# EAGLE board PCB_ (EAGLE 9.7.0)
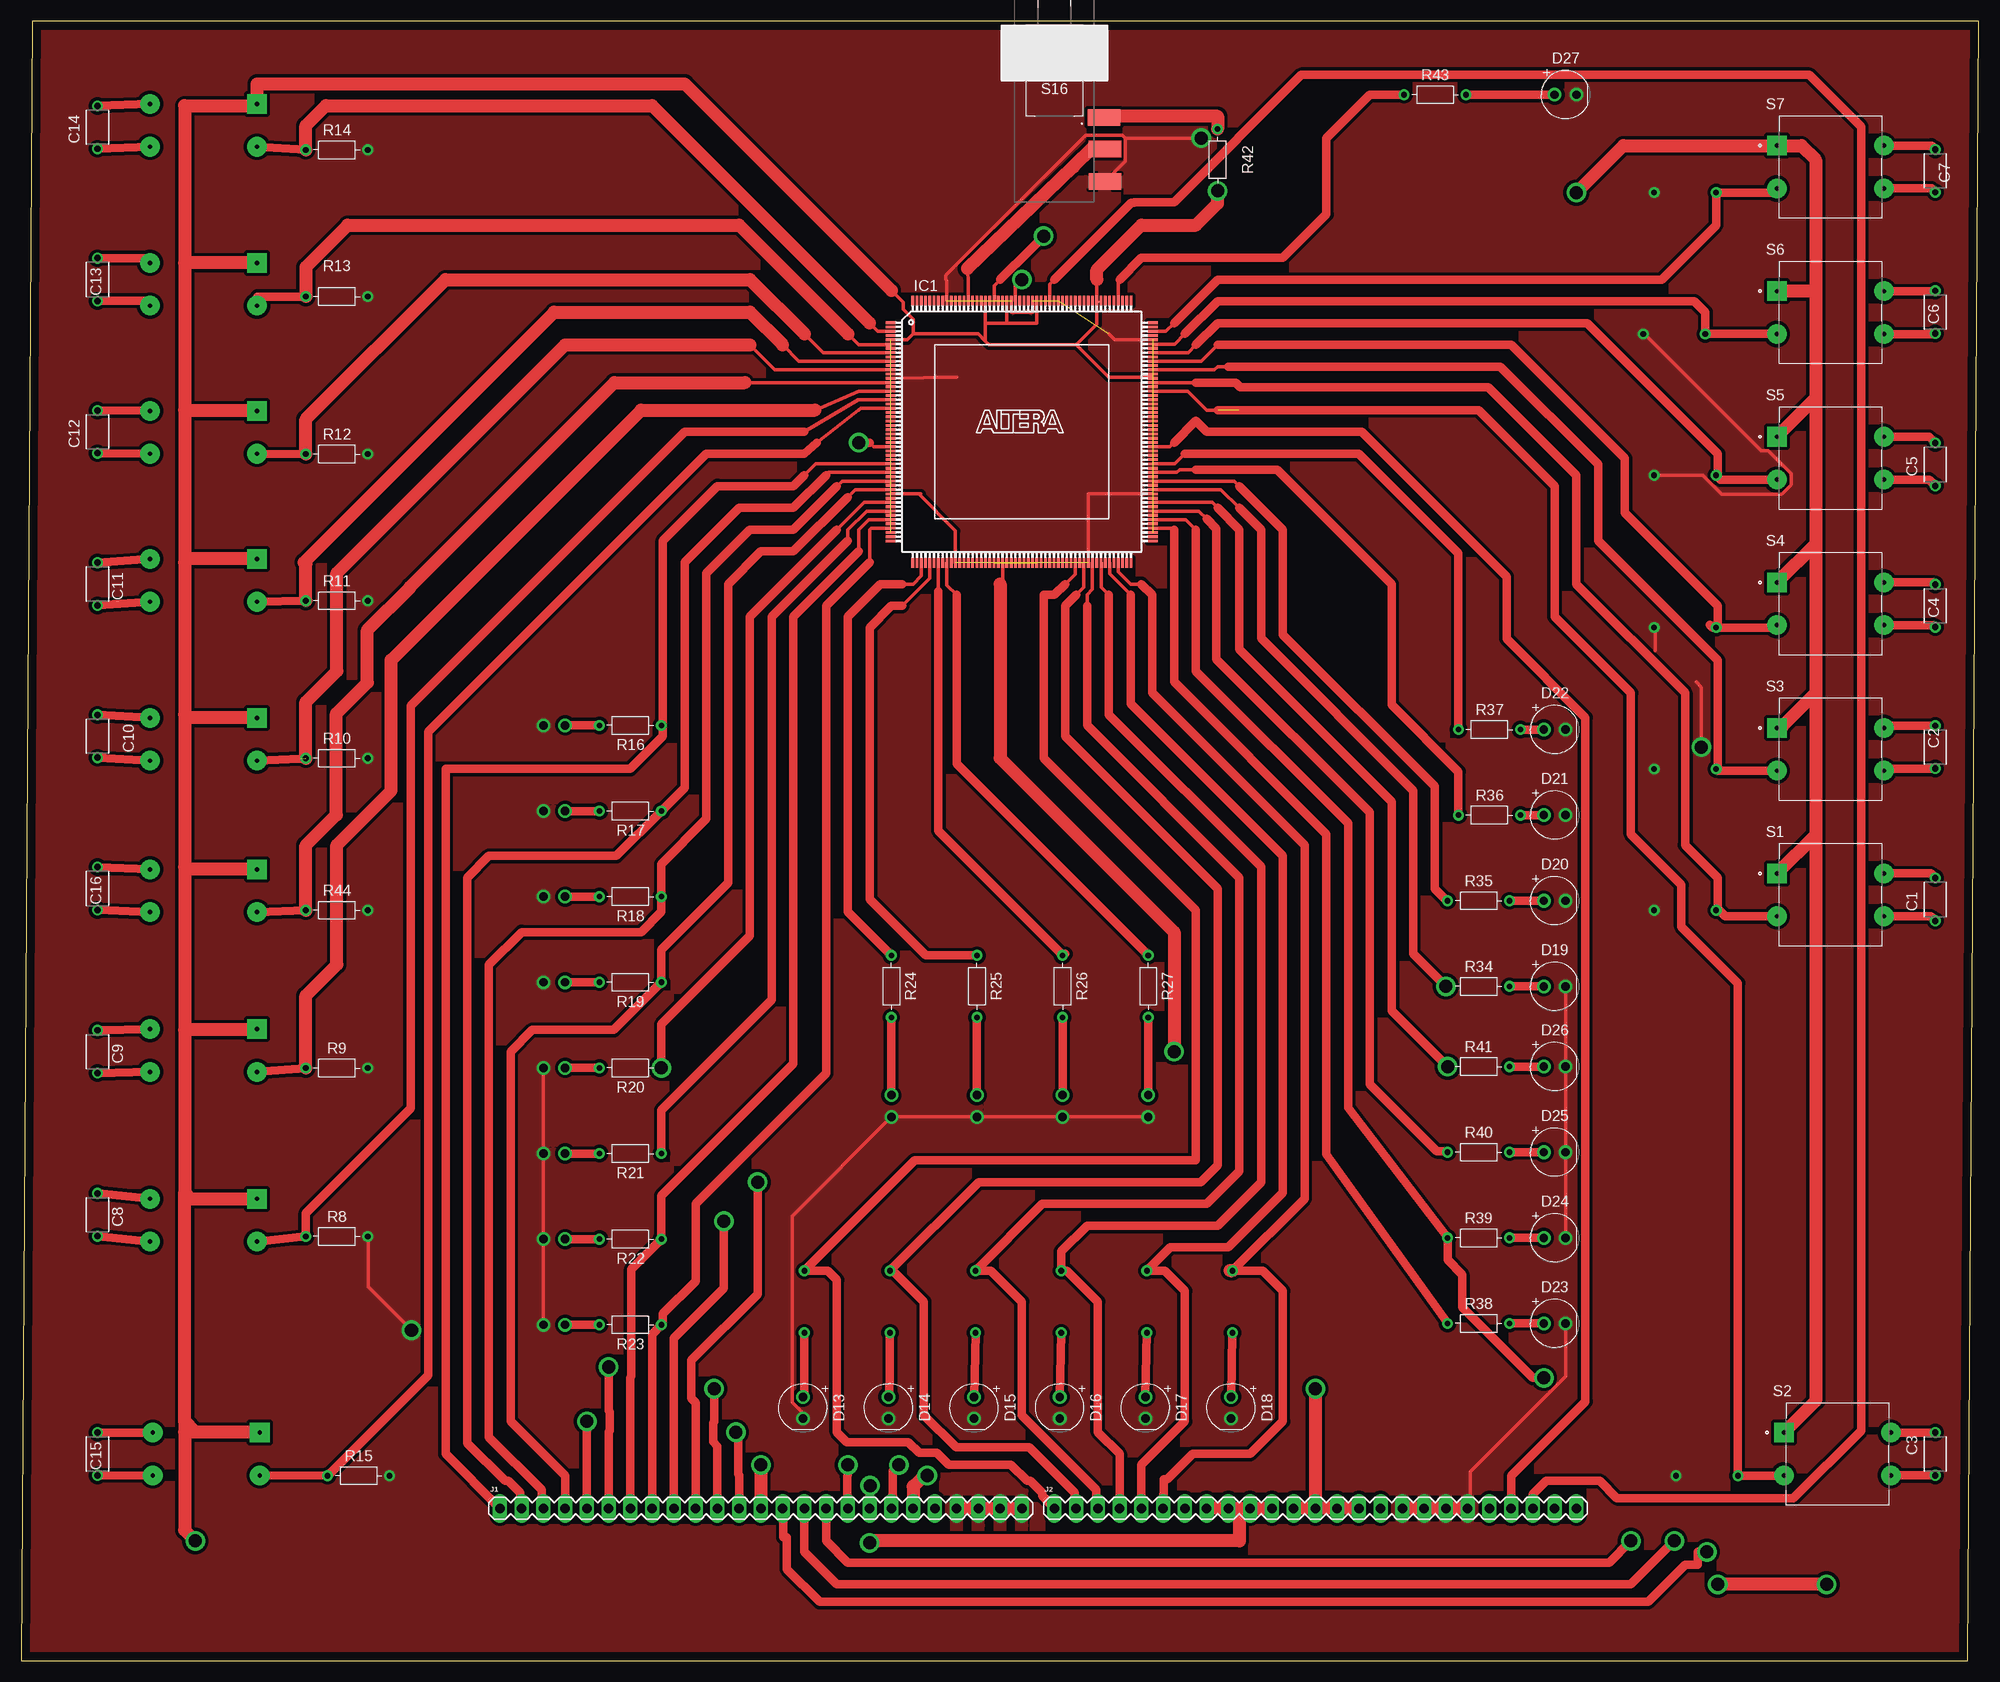
[diagram p0: board, top side]
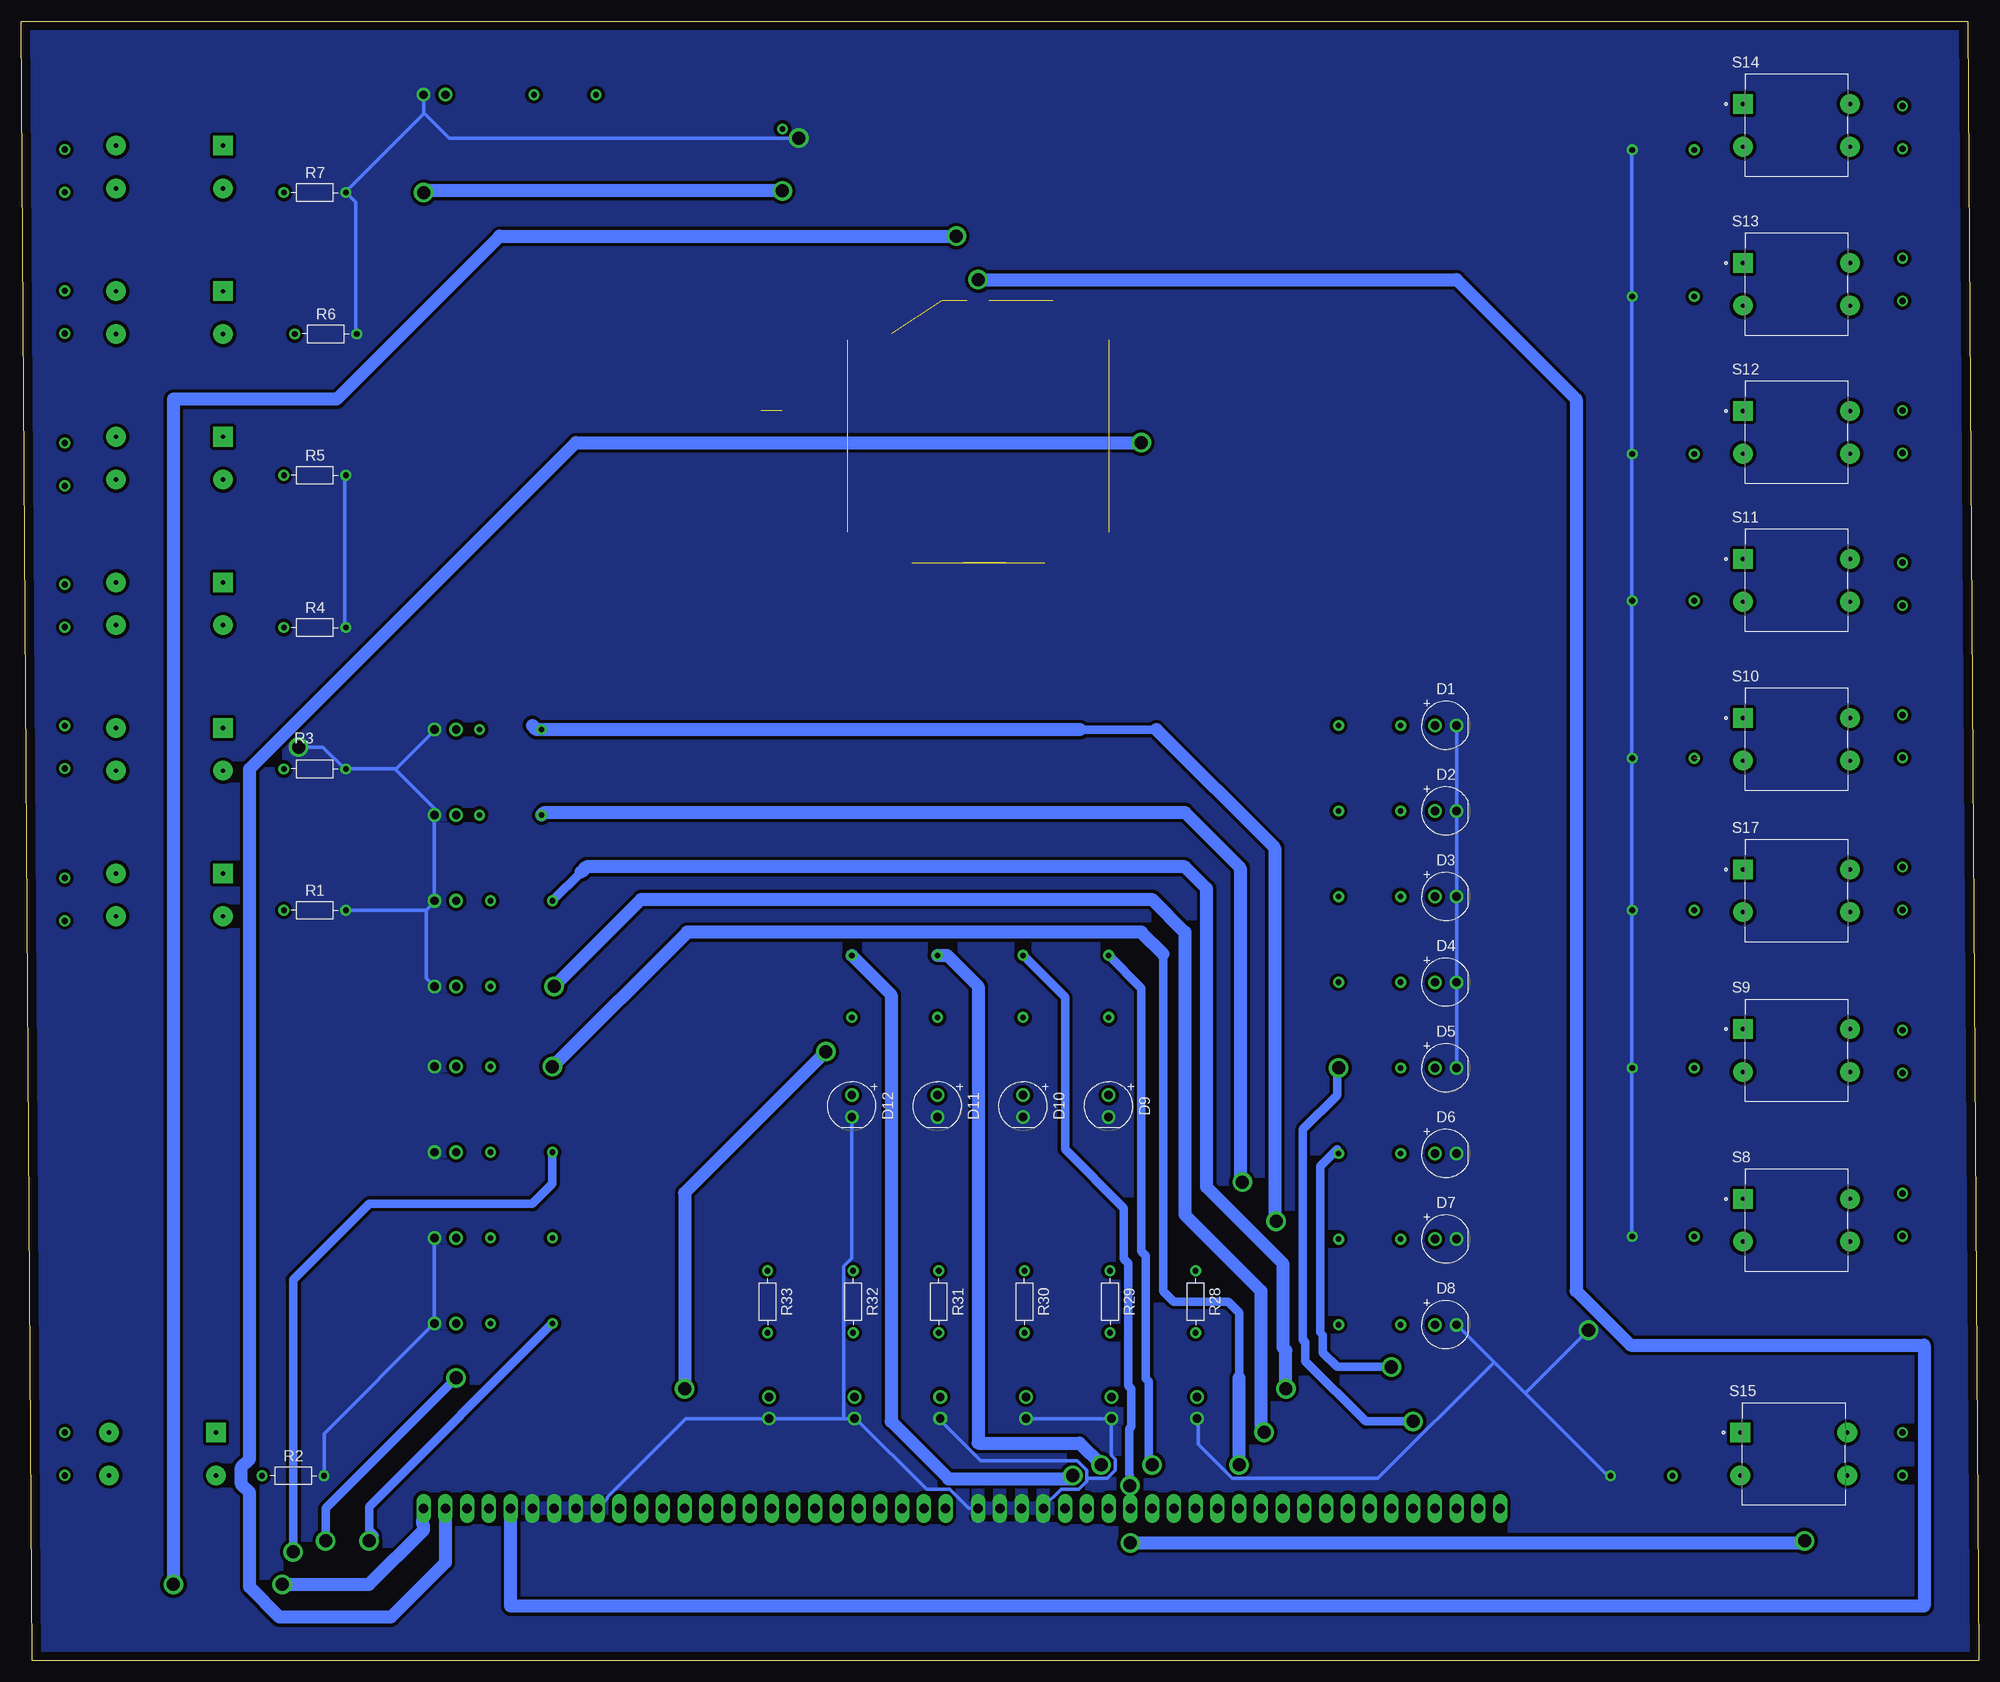
[diagram p1: board, bottom side, seen from below]

Size 228.58 x 191.44 mm. Coordinates in mm from the lower left corner, seen from the top.
Outline: 0,0 227.31,0 228.58,191.44 1.27,191.44 0,0
Copper layers (1*16): Top 0.035mm / dielectric 1.5mm / Bottom 0.035mm
Design rules "default": minimum track width 6mil, minimum drill 0.35mm, track to track 6mil, track to pad 6mil, pad to pad 6mil, via to via 6mil, smd to smd 6mil, copper to edge 40mil, drill to drill 6mil, minimum pad ring 10mil, minimum via ring 8mil, stop-mask expansion 4mil, vias tented up to drill 0mil, thermal gap 10mil
Net classes: 0 default: width 1.016 mm, drill 1.016 mm, clearance 0.762 mm; 1 pwr: width 0.381 mm, drill 0.381 mm, clearance 0.381 mm

## Footprints (pad centres in the part's own frame; a part is rotated, then mirrored left to right if it is on the bottom)
K104K15X7RF53H5 = drill 0.75 pad 1.25: 1 -2.5,0; 2 2.5,0
LEDRD254W60D565H860B = drill 0.981 pad 1.581: 1 -1.27,0; 2 1.27,0
RQFP208 = smd 1.2 x 0.32: 1 -15.3,12.75; 2 -15.3,12.25; 3 -15.3,11.75; 4 -15.3,11.25; 5 -15.3,10.75; 6 -15.3,10.25; 7 -15.3,9.75; 8 -15.3,9.25; 9 -15.3,8.75; 10 -15.3,8.25; 11 -15.3,7.75; 12 -15.3,7.25; 13 -15.3,6.75; 14 -15.3,6.25; 15 -15.3,5.75; 16 -15.3,5.25; 17 -15.3,4.75; 18 -15.3,4.25; 19 -15.3,3.75; 20 -15.3,3.25; 21 -15.3,2.75; 22 -15.3,2.25; 23 -15.3,1.75; 24 -15.3,1.25; 25 -15.3,0.75; 26 -15.3,0.25; 27 -15.3,-0.25; 28 -15.3,-0.75; 29 -15.3,-1.25; 30 -15.3,-1.75; 31 -15.3,-2.25; 32 -15.3,-2.75; 33 -15.3,-3.25; 34 -15.3,-3.75; 35 -15.3,-4.25; 36 -15.3,-4.75; 37 -15.3,-5.25; 38 -15.3,-5.75; 39 -15.3,-6.25; 40 -15.3,-6.75; 41 -15.3,-7.25; 42 -15.3,-7.75; 43 -15.3,-8.25; 44 -15.3,-8.75; 45 -15.3,-9.25; 46 -15.3,-9.75; 47 -15.3,-10.25; 48 -15.3,-10.75; 49 -15.3,-11.25; 50 -15.3,-11.75; 51 -15.3,-12.25; 52 -15.3,-12.75; 105 15.3,-12.75; 106 15.3,-12.25; 107 15.3,-11.75; 108 15.3,-11.25; 109 15.3,-10.75; 110 15.3,-10.25; 111 15.3,-9.75; 112 15.3,-9.25; 113 15.3,-8.75; 114 15.3,-8.25; 115 15.3,-7.75; 116 15.3,-7.25; 117 15.3,-6.75; 118 15.3,-6.25; 119 15.3,-5.75; 120 15.3,-5.25; 121 15.3,-4.75; 122 15.3,-4.25; 123 15.3,-3.75; 124 15.3,-3.25; 125 15.3,-2.75; 126 15.3,-2.25; 127 15.3,-1.75; 128 15.3,-1.25; 129 15.3,-0.75; 130 15.3,-0.25; 131 15.3,0.25; 132 15.3,0.75; 133 15.3,1.25; 134 15.3,1.75; 135 15.3,2.25; 136 15.3,2.75; 137 15.3,3.25; 138 15.3,3.75; 139 15.3,4.25; 140 15.3,4.75; 141 15.3,5.25; 142 15.3,5.75; 143 15.3,6.25; 144 15.3,6.75; 145 15.3,7.25; 146 15.3,7.75; 147 15.3,8.25; 148 15.3,8.75; 149 15.3,9.25; 150 15.3,9.75; 151 15.3,10.25; 152 15.3,10.75; 153 15.3,11.25; 154 15.3,11.75; 155 15.3,12.25; 156 15.3,12.75 | smd 0.32 x 1.2: 53 -12.75,-15.3; 54 -12.25,-15.3; 55 -11.75,-15.3; 56 -11.25,-15.3; 57 -10.75,-15.3; 58 -10.25,-15.3; 59 -9.75,-15.3; 60 -9.25,-15.3; 61 -8.75,-15.3; 62 -8.25,-15.3; 63 -7.75,-15.3; 64 -7.25,-15.3; 65 -6.75,-15.3; 66 -6.25,-15.3; 67 -5.75,-15.3; 68 -5.25,-15.3; 69 -4.75,-15.3; 70 -4.25,-15.3; 71 -3.75,-15.3; 72 -3.25,-15.3; 73 -2.75,-15.3; 74 -2.25,-15.3; 75 -1.75,-15.3; 76 -1.25,-15.3; 77 -0.75,-15.3; 78 -0.25,-15.3; 79 0.25,-15.3; 80 0.75,-15.3; 81 1.25,-15.3; 82 1.75,-15.3; 83 2.25,-15.3; 84 2.75,-15.3; 85 3.25,-15.3; 86 3.75,-15.3; 87 4.25,-15.3; 88 4.75,-15.3; 89 5.25,-15.3; 90 5.75,-15.3; 91 6.25,-15.3; 92 6.75,-15.3; 93 7.25,-15.3; 94 7.75,-15.3; 95 8.25,-15.3; 96 8.75,-15.3; 97 9.25,-15.3; 98 9.75,-15.3; 99 10.25,-15.3; 100 10.75,-15.3; 101 11.25,-15.3; 102 11.75,-15.3; 103 12.25,-15.3; 104 12.75,-15.3; 157 12.75,15.3; 158 12.25,15.3; 159 11.75,15.3; 160 11.25,15.3; 161 10.75,15.3; 162 10.25,15.3; 163 9.75,15.3; 164 9.25,15.3; 165 8.75,15.3; 166 8.25,15.3; 167 7.75,15.3; 168 7.25,15.3; 169 6.75,15.3; 170 6.25,15.3; 171 5.75,15.3; 172 5.25,15.3; 173 4.75,15.3; 174 4.25,15.3; 175 3.75,15.3; 176 3.25,15.3; 177 2.75,15.3; 178 2.25,15.3; 179 1.75,15.3; 180 1.25,15.3; 181 0.75,15.3; 182 0.25,15.3; 183 -0.25,15.3; 184 -0.75,15.3; 185 -1.25,15.3; 186 -1.75,15.3; 187 -2.25,15.3; 188 -2.75,15.3; 189 -3.25,15.3; 190 -3.75,15.3; 191 -4.25,15.3; 192 -4.75,15.3; 193 -5.25,15.3; 194 -5.75,15.3; 195 -6.25,15.3; 196 -6.75,15.3; 197 -7.25,15.3; 198 -7.75,15.3; 199 -8.25,15.3; 200 -8.75,15.3; 201 -9.25,15.3; 202 -9.75,15.3; 203 -10.25,15.3; 204 -10.75,15.3; 205 -11.25,15.3; 206 -11.75,15.3; 207 -12.25,15.3; 208 -12.75,15.3
1X25_LONGPAD = drill 1.118 long: 1 0,0; 2 2.54,0; 3 5.08,0; 4 7.62,0; 5 10.16,0; 6 12.7,0; 7 15.24,0; 8 17.78,0; 9 20.32,0; 10 22.86,0; 11 25.4,0; 12 27.94,0; 13 30.48,0; 14 33.02,0; 15 35.56,0; 16 38.1,0; 17 40.64,0; 18 43.18,0; 19 45.72,0; 20 48.26,0; 21 50.8,0; 22 53.34,0; 23 55.88,0; 24 58.42,0; 25 60.96,0
RESAD724W46L381D178B = drill 0.66 pad 1.26: 1 -3.62,0; 2 3.62,0
SW_TL1100F160Q = drill 0.508 pad 2.286 square: 1 -6.25,2.5 | drill 0.508 pad 2.286: 2 6.25,2.5; 3 -6.25,-2.5; 4 6.25,-2.5
7347306 = smd 3.81 x 1.93: P$2 5.79,-0.1; P$3 5.9,-3.8; P$6 5.9,-7.6

## Placement (x,y rotation side)
C1  0.1uF  [K104K15X7RF53H5]  223.52,88.9 90 top
C2  0.1uF  [K104K15X7RF53H5]  223.52,106.68 90 top
C3  0.1uF  [K104K15X7RF53H5]  223.52,24.13 90 top
C4  0.1uF  [K104K15X7RF53H5]  223.52,123.19 90 top
C5  0.1uF  [K104K15X7RF53H5]  223.52,139.7 90 top
C6  0.1uF  [K104K15X7RF53H5]  223.52,157.48 90 top
C7  0.1uF  [K104K15X7RF53H5]  223.52,173.99 90 top
C8  0.1uF  [K104K15X7RF53H5]  8.89,52.07 90 top
C9  0.1uF  [K104K15X7RF53H5]  8.89,71.12 90 top
C10  0.1uF  [K104K15X7RF53H5]  8.89,107.95 90 top
C11  0.1uF  [K104K15X7RF53H5]  8.89,125.73 90 top
C12  0.1uF  [K104K15X7RF53H5]  8.89,143.51 90 top
C13  0.1uF  [K104K15X7RF53H5]  8.89,161.29 90 top
C14  0.1uF  [K104K15X7RF53H5]  8.89,179.07 90 top
C15  0.1uF  [K104K15X7RF53H5]  8.89,24.13 90 top
C16  0.1uF  [K104K15X7RF53H5]  8.89,90.17 90 top
D1  LED_RED  [LEDRD254W60D565H860B]  62.23,109.22 0 bottom
D2  LED_RED  [LEDRD254W60D565H860B]  62.23,99.22 0 bottom
D3  LED_RED  [LEDRD254W60D565H860B]  62.23,89.22 0 bottom
D4  LED_RED  [LEDRD254W60D565H860B]  62.23,79.22 0 bottom
D5  LED_RED  [LEDRD254W60D565H860B]  62.23,69.22 0 bottom
D6  LED_RED  [LEDRD254W60D565H860B]  62.23,59.22 0 bottom
D7  LED_RED  [LEDRD254W60D565H860B]  62.23,49.22 0 bottom
D8  LED_RED  [LEDRD254W60D565H860B]  62.23,39.22 0 bottom
D9  LED_RED  [LEDRD254W60D565H860B]  101.6,64.77 270 bottom
D10  LED_RED  [LEDRD254W60D565H860B]  111.6,64.77 270 bottom
D11  LED_RED  [LEDRD254W60D565H860B]  121.6,64.77 270 bottom
D12  LED_RED  [LEDRD254W60D565H860B]  131.6,64.77 270 bottom
D13  LED_RED  [LEDRD254W60D565H860B]  91.27,29.53 270 top
D14  LED_RED  [LEDRD254W60D565H860B]  101.27,29.53 270 top
D15  LED_RED  [LEDRD254W60D565H860B]  111.27,29.53 270 top
D16  LED_RED  [LEDRD254W60D565H860B]  121.27,29.53 270 top
D17  LED_RED  [LEDRD254W60D565H860B]  131.27,29.53 270 top
D18  LED_RED  [LEDRD254W60D565H860B]  141.27,29.53 270 top
D19  LED_RED  [LEDRD254W60D565H860B]  179.07,78.74 0 top
D20  LED_RED  [LEDRD254W60D565H860B]  179.07,88.74 0 top
D21  LED_RED  [LEDRD254W60D565H860B]  179.07,98.74 0 top
D22  LED_RED  [LEDRD254W60D565H860B]  179.07,108.74 0 top
D23  LED_RED  [LEDRD254W60D565H860B]  179.07,39.37 0 top
D24  LED_RED  [LEDRD254W60D565H860B]  179.07,49.37 0 top
D25  LED_RED  [LEDRD254W60D565H860B]  179.07,59.37 0 top
D26  LED_RED  [LEDRD254W60D565H860B]  179.07,69.37 0 top
D27  LED_RED  [LEDRD254W60D565H860B]  180.34,182.88 0 top
IC1  EPM7256-Q208  [RQFP208]  116.84,143.51 0 top
J1  LEFT  [1X25_LONGPAD]  55.88,17.78 0 top
J2  LEFT  [1X25_LONGPAD]  120.65,17.78 0 top
R1  10k  [RESAD724W46L381D178B]  194.31,87.63 0 bottom
R2  10k  [RESAD724W46L381D178B]  196.85,21.59 0 bottom
R3  10k  [RESAD724W46L381D178B]  194.31,104.14 0 bottom
R4  10k  [RESAD724W46L381D178B]  194.31,120.65 0 bottom
R5  10k  [RESAD724W46L381D178B]  194.31,138.43 0 bottom
R6  10k  [RESAD724W46L381D178B]  193.04,154.94 0 bottom
R7  10k  [RESAD724W46L381D178B]  194.31,171.45 0 bottom
R8  10k  [RESAD724W46L381D178B]  36.83,49.53 0 top
R9  10k  [RESAD724W46L381D178B]  36.83,69.2 0 top
R10  10k  [RESAD724W46L381D178B]  36.83,105.38 0 top
R11  10k  [RESAD724W46L381D178B]  36.83,123.78 0 top
R12  10k  [RESAD724W46L381D178B]  36.83,140.91 0 top
R13  10k  [RESAD724W46L381D178B]  36.83,159.31 0 top
R14  10k  [RESAD724W46L381D178B]  36.83,176.44 0 top
R15  10k  [RESAD724W46L381D178B]  39.37,21.59 0 top
R16  220  [RESAD724W46L381D178B]  71.12,109.22 180 top
R17  220  [RESAD724W46L381D178B]  71.12,99.22 180 top
R18  220  [RESAD724W46L381D178B]  71.12,89.22 180 top
R19  220  [RESAD724W46L381D178B]  71.12,79.22 180 top
R20  220  [RESAD724W46L381D178B]  71.12,69.22 180 top
R21  220  [RESAD724W46L381D178B]  71.12,59.22 180 top
R22  220  [RESAD724W46L381D178B]  71.12,49.22 180 top
R23  220  [RESAD724W46L381D178B]  71.12,39.22 180 top
R24  220  [RESAD724W46L381D178B]  101.6,78.74 270 top
R25  220  [RESAD724W46L381D178B]  111.6,78.74 270 top
R26  220  [RESAD724W46L381D178B]  121.6,78.74 270 top
R27  220  [RESAD724W46L381D178B]  131.6,78.74 270 top
R28  220  [RESAD724W46L381D178B]  91.44,41.91 270 bottom
R29  220  [RESAD724W46L381D178B]  101.44,41.91 270 bottom
R30  220  [RESAD724W46L381D178B]  111.44,41.91 270 bottom
R31  220  [RESAD724W46L381D178B]  121.44,41.91 270 bottom
R32  220  [RESAD724W46L381D178B]  131.44,41.91 270 bottom
R33  220  [RESAD724W46L381D178B]  141.44,41.91 270 bottom
R34  220  [RESAD724W46L381D178B]  170.18,78.74 0 top
R35  220  [RESAD724W46L381D178B]  170.18,88.74 0 top
R36  220  [RESAD724W46L381D178B]  171.45,98.74 0 top
R37  220  [RESAD724W46L381D178B]  171.45,108.74 0 top
R38  220  [RESAD724W46L381D178B]  170.18,39.37 0 top
R39  220  [RESAD724W46L381D178B]  170.18,49.37 0 top
R40  220  [RESAD724W46L381D178B]  170.18,59.37 0 top
R41  220  [RESAD724W46L381D178B]  170.18,69.37 0 top
R42  10k  [RESAD724W46L381D178B]  139.7,175.26 270 top
R43  220  [RESAD724W46L381D178B]  165.1,182.88 0 top
R44  10k  [RESAD724W46L381D178B]  36.83,87.63 0 top
S1  INC_VIS3  [SW_TL1100F160Q]  211.27,89.43 0 top
S2  INI_TMP  [SW_TL1100F160Q]  212.09,24.13 0 top
S3  INC_VIS2  [SW_TL1100F160Q]  211.27,106.43 0 top
S4  INC_VIS1  [SW_TL1100F160Q]  211.27,123.43 0 top
S5  INC_LOC3  [SW_TL1100F160Q]  211.27,140.43 0 top
S6  INC_LOC2  [SW_TL1100F160Q]  211.27,157.43 0 top
S7  INC_LOC1  [SW_TL1100F160Q]  211.27,174.43 0 top
S8  DEC_SEG  [SW_TL1100F160Q]  21.27,51.43 0 bottom
S9  INC_SEC  [SW_TL1100F160Q]  21.27,71.26 0 bottom
S10  INC_MIN  [SW_TL1100F160Q]  21.27,107.6 0 bottom
S11  DEC_VIS  [SW_TL1100F160Q]  21.27,126.16 0 bottom
S12  INC_VIS  [SW_TL1100F160Q]  21.27,143.45 0 bottom
S13  DEC_LOC  [SW_TL1100F160Q]  21.27,160.74 0 bottom
S14  INC_LOC  [SW_TL1100F160Q]  21.27,179.3 0 bottom
S15  RST_BTN  [SW_TL1100F160Q]  21.59,24.13 0 bottom
S16  ARR_BTN  [7347306]  120.65,180.34 0 top
S17  DEC_MIN  [SW_TL1100F160Q]  21.27,89.91 0 bottom

## Library data of the parts
C1-C16 = Library_Capacitor_Ceramico; ARROW_PART_NUMBER: K104K15X7RF53H5; ARROW_PRICE-STOCK: https://www.arrow.com/en/products/k104k15x7rf53h5/vishay?region=nac; DESCRIPTION: Vishay 100nF Multilayer Ceramic Capacitor MLCC 50V dc +/-10% Through Hole K104K15X7RF53H5; HEIGHT: mm; MANUFACTURER_NAME: Vishay; MANUFACTURER_PART_NUMBER: K104K15X7RF53H5; MOUSER_PART_NUMBER: 594-K104K15X7RF53H5; MOUSER_PRICE-STOCK: https://www.mouser.co.uk/ProductDetail/Vishay-BC-Components/K104K15X7RF53H5?qs=sYfpZ29HcUSlgH5bSUHkYw%3D%3D
D1-D27 = Opto-Electronic; CATEGORY: Opto-Electronic; SUB-CATEGORY: LED
IC1 = altera; MPN: EPM7256AEQC208-10N; OC_FARNELL: 1549440; OC_NEWARK: 51R9842
J1 J2 = SparkFun-Connectors
R1-R44 = Resistor; CATEGORY: Resistor; SUB-CATEGORY: Fixed
S1-S15 S17 = SnapEDA Library; MANUFACTURER: E-Switch; MAXIMUM_PACKAGE_HEIGHT: 7.3mm; PARTREV: D; SNAPEDA_PN: TL1100F160Q; STANDARD: Manufacturer Recommendations
S16 = Library_Switch; DESCRIPTION: SPDT Slide Switch; HEIGHT: 12.7mm; MANUFACTURER_NAME: RS Components; MANUFACTURER_PART_NUMBER: 734-7306

## Nets
5V [pwr]: IC1.74 J2.12 J2.13 J2.14 J2.15
CLK: IC1.184 J2.21
GND [pwr]: D1.2 D2.2 D3.2 D4.2 D5.2 D6.2 D7.2 D8.2 D9.2 D10.2 D11.2 D12.2 D13.2 D14.2 D15.2 D16.2 D17.2 D18.2 D19.2 D20.2 D21.2 D22.2 D23.2 D24.2 D25.2 D26.2 D27.2 IC1.14 IC1.32 IC1.50 IC1.72 IC1.75 IC1.82 IC1.94 IC1.116 IC1.134 IC1.152 IC1.174 IC1.180 IC1.185 IC1.200 J1.22 J1.23 J1.24 J1.25 J2.17 J2.18 J2.19 J2.20 R1.2 R2.2 R3.2 R4.2 R5.2 R6.2 R7.2 R8.2 R9.2 R10.2 R11.2 R12.2 R13.2 R14.2 R15.2 R44.2 S16.P$6
LOC0: IC1.34 J1.1 R16.1
LOC1: IC1.36 J1.2 R17.1
LOC2: IC1.38 J1.3 R18.1
LOC3: IC1.40 J1.4 R19.1
LOC4: IC1.43 J1.5 R20.1
LOC5: IC1.45 J1.6 R21.1
LOC6: IC1.47 J1.7 R22.1
LOC7: IC1.49 J1.8 R23.1
MIN0: IC1.55 J1.17 R24.1
MIN1: IC1.57 J1.18 R25.1
MIN2: IC1.59 J1.19 R26.1
MIN3: IC1.61 J1.20 R27.1
N$1: IC1.3 R14.1 S14.3
N$2: IC1.10 R11.1 S11.3
N$3: IC1.142 R1.1 S1.3
N$4: C1.1 S1.4
N$5: C1.2 S1.2
N$6: IC1.140 R2.1 S2.3
N$7: C2.1 S3.4
N$8: C3.1 S2.4
N$9: IC1.145 R3.1 S3.3
N$10: C3.2 S2.2
N$11: C2.2 S3.2
N$12: IC1.147 R4.1 S4.3
N$13: C4.1 S4.4
N$14: C4.2 S4.2
N$15: IC1.8 R12.1 S12.3
N$16: C5.1 S5.4
N$17: C5.2 S5.2
N$18: IC1.151 R6.1 S6.3
N$19: IC1.149 R5.1 S5.3
N$20: C6.1 S6.4
N$21: IC1.19 R8.1 S8.3
N$22: C8.1 S8.4
N$23: C8.2 S8.2
N$24: C15.1 S15.4
N$25: IC1.17 R9.1 S9.3
N$26: C9.1 S9.4
N$27: C9.2 S9.2
N$28: C10.1 S10.4
N$29: C10.2 S10.2
N$30: C11.1 S11.4
N$31: C11.2 S11.2
N$32: C12.1 S12.4
N$33: C12.2 S12.2
N$34: IC1.6 R13.1 S13.3
N$35: C13.1 S13.4
N$36: C13.2 S13.2
N$37: C15.2 S15.2
N$38: C14.1 S14.4
N$39: C16.1 S17.4
N$40: C14.2 S14.2
N$41: IC1.12 R10.1 S10.3
N$42: C16.2 S17.2
N$45: D1.1 R16.2
N$46: D2.1 R17.2
N$47: D3.1 R18.2
N$48: D4.1 R19.2
N$49: D5.1 R20.2
N$50: D6.1 R21.2
N$51: D7.1 R22.2
N$52: D8.1 R23.2
N$53: D27.1 R43.2
N$54: C6.2 S6.2
N$55: IC1.154 R7.1 S7.3
N$56: C7.1 S7.4
N$57: C7.2 S7.2
N$61: D9.1 R24.2
N$62: D10.1 R25.2
N$63: D11.1 R26.2
N$64: D12.1 R27.2
N$65: D13.1 R28.2
N$66: D14.1 R29.2
N$67: D15.1 R30.2
N$68: D16.1 R31.2
N$78: D17.1 R32.2
N$79: D18.1 R33.2
N$80: D19.1 R34.2
N$81: D20.1 R35.2
N$84: D21.1 R36.2
N$85: D22.1 R37.2
N$90: D23.1 R38.2
N$91: D24.1 R39.2
N$92: D25.1 R40.2
N$93: D26.1 R41.2
N$98: IC1.195 S16.P$3
N$99: R42.1 S16.P$2
PIN15: IC1.15 R44.1 S17.3
RST: IC1.21 R15.1 S15.3
SEG0: IC1.91 J2.1 R28.1
SEG1: IC1.93 J2.2 R29.1
SEG2: IC1.95 J2.3 R30.1
SEG3: IC1.97 J2.4 R31.1
SEG4: IC1.99 J2.5 R32.1
SEG5: IC1.101 J2.6 R33.1
SIRENA: IC1.160 R43.1
TCK: IC1.30 J2.24
TDI: IC1.176 J2.23
TDO: IC1.189 J2.25
TMS: IC1.127 J2.22
VCC [pwr]: IC1.5 IC1.23 IC1.41 IC1.63 IC1.83 IC1.85 IC1.107 IC1.125 IC1.143 IC1.165 IC1.179 IC1.186 IC1.191 J2.8 J2.9 J2.10 J2.11 R42.2 S1.1 S2.1 S3.1 S4.1 S5.1 S6.1 S7.1 S8.1 S9.1 S10.1 S11.1 S12.1 S13.1 S14.1 S15.1 S17.1
VIS0: IC1.123 J1.9 R37.1
VIS1: IC1.121 J1.10 R36.1
VIS2: IC1.119 J1.11 R35.1
VIS3: IC1.117 J1.12 R34.1
VIS4: IC1.114 J1.13 R41.1
VIS5: IC1.112 J1.14 R40.1
VIS6: IC1.110 J1.15 R39.1
VIS7: IC1.108 J1.16 R38.1

## Tracks (layer width: path | path; a pad name or v marks a point on that pad's centre or on a via)
5V  (via drill 1.52)
  Top 0.381: IC1.74 114.59,126.02 114.3,125.73
  Top 1.524: J2.15 J2.14 J2.13 | J2.13 J2.12 | 114.3,125.73 114.3,105.41 134.62,85.09 v134.62,71.12 | v151.13,31.75 J2.13
  Bottom 1.524: v134.62,71.12 151.13,54.61 v151.13,31.75
CLK  (via drill 1.52)
  Top 0.381: IC1.184 116.09,160.54 v116.84,161.29
  Bottom 1.524: v116.84,161.29 60.96,161.29 46.99,147.32 46.99,43.18 40.64,36.83 6.35,36.83 6.35,6.35 171.45,6.35 J2.21
GND  (via drill 1.52)  (10 unrouted)
  Top 0.381: IC1.200 108.09,161.15 107.95,161.29 107.95,161.77 124.3,178.12 128.59,178.12 128.91,177.8 | IC1.185 115.59,157.46 118.09,157.46 118.11,157.48 118.09,157.5 IC1.180 | 128.91,177.8 128.91,175.1 126.68,172.88 S16.P$6 | R5.2 196.37,138.43 198.6,136.21 205.58,136.21 206.69,137.32 206.69,138.59 203.99,141.29 203.2,141.29 189.55,154.94 R6.2 | v137.8,177.8 128.91,177.8 | D8.2 D7.2 D6.2 D5.2 | D13.2 91.12,28.42 91.12,29.05 90.01,30.16 90.01,51.91 D9.2 D10.2 D11.2 D12.2 | D19.2 D26.2 D25.2 D24.2 | D23.2 180.34,33.18 169.23,22.07 169.23,18.41 J2.20 | v45.56,38.58 40.48,43.66 40.48,49.53 R8.2 | 190.82,117.95 190.82,120.65 R4.2 | v196.22,106.68 196.22,113.66 195.58,114.3 | IC1.94 124.59,136.26 IC1.116 | IC1.152 127.68,154.26 127,154.94 | IC1.14 109.22,149.86 106.68,149.86
  Top 1.524: J2.17 J2.18 J2.19 J2.20 | J1.23 J1.25 | J1.23 110.49,17.78 | J1.23 J1.22
  Bottom 0.381: R4.2 190.82,120.65 190.82,138.43 R5.2 | R6.2 189.55,154.94 189.55,170.34 190.66,171.45 R7.2 190.66,171.61 181.61,180.66 | 181.61,180.66 D27.2 | v137.8,177.8 178.59,177.8 181.45,180.66 181.61,180.66 | R8.2 40.48,49.53 40.48,69.06 R9.2 40.48,69.37 40.48,87.47 R44.2 40.48,87.63 40.48,105.25 R10.2 40.48,105.57 40.48,123.67 R11.2 40.48,123.82 40.48,140.81 R12.2 40.48,140.97 40.48,159.23 R13.2 40.48,159.39 40.48,176.37 R14.2 | R15.2 43.34,21.59 52.94,31.19 | 56.59,34.85 D8.2 | 56.59,34.85 52.94,31.19 | D5.2 D4.2 D3.2 D2.2 D1.2 | D15.2 111.12,28.26 101.28,28.26 D14.2 101.28,28.1 101.28,23.97 100.81,23.49 100.81,22.23 101.76,21.27 104.14,21.27 | 104.14,21.27 104.14,20.95 105.09,20 107.16,20 109.22,17.94 J1.22 | 104.14,21.27 104.14,22.23 105.25,23.34 116.52,23.34 121.13,27.94 121.13,28.26 D16.2 | 132.56,28.26 141.13,28.26 D18.2 141.45,28.26 150.97,28.26 160.18,19.05 160.18,18.89 J2.17 | 132.56,28.26 131.29,28.26 D17.2 131.13,28.26 122.87,20 120.17,20 117.95,17.78 J1.25 | R2.2 193.2,21.59 193.2,26.51 D23.2 D24.2 | 184.78,104.14 R3.2 190.82,104.14 193.36,106.68 v196.22,106.68 | 184.78,104.14 180.34,108.59 D22.2 | 184.78,104.14 184.78,103.98 180.34,99.54 D21.2 D20.2 180.34,88.58 181.29,87.63 | 181.29,87.63 R1.2 | 181.29,87.63 181.29,79.69 D19.2 | 132.56,28.26 132.56,46.04 131.6,46.99 D12.2 | 56.59,34.85 70.17,21.27 87.15,21.27 91.12,25.24 91.12,28.26 D13.2 | 52.94,31.19 v45.56,38.58
  pour Top: 0.77,0.76 226.55,0.76 227.81,190.68 2.03,190.68
  pour Bottom: 0.76,-0.51 227.84,-0.51 227.84,189.74 2.03,189.74 0.76,3.81
LOC0
  Top 0.381: IC1.34 92.77,139.76 91.44,138.43
  Top 1.016: R16.1 74.93,109.41 | 74.93,109.41 74.93,130.81 81.28,137.16 90.17,137.16 91.44,138.43 | J1.1 49.53,24.13 49.53,104.14 71.12,104.14 74.93,107.95 74.93,109.41
LOC1
  Top 0.381: IC1.36 94.31,138.76 93.98,138.43
  Top 1.016: 93.98,138.43 90.17,134.62 83.82,134.62 77.47,128.27 77.47,101.95 R17.1 69.5,93.98 54.61,93.98 52.07,91.44 52.07,25.4 56.49,20.98 56.86,20.98 58.24,19.6 58.24,17.96 J1.2
LOC2
  Top 0.381: IC1.38 95.85,137.76 95.25,137.16
  Top 1.016: 95.25,137.16 90.17,132.08 85.09,132.08 80.01,127 80.01,98.3 74.74,93.03 R18.1 74.74,87.44 72.39,85.09 58.42,85.09 54.61,81.28 54.61,26.1 60.78,19.93 60.78,17.96 J1.3
LOC3
  Top 0.381: IC1.40 97.39,136.76 96.52,135.89
  Top 1.016: 96.52,135.89 90.17,129.54 86.36,129.54 82.55,125.73 82.55,90.84 74.74,83.03 R19.1 69.18,73.66 59.69,73.66 57.15,71.12 57.15,27.94 63.5,21.59 J1.4
LOC4  (via drill 1.52)
  Top 0.381: IC1.43 98.43,135.26 95.25,132.08
  Top 1.016: R20.1 74.74,74.3 85.09,84.65 85.09,121.92 95.25,132.08 | J1.5 v66.04,27.94
  Bottom 1.016: R20.1 74.93,69.03 74.93,66.04 78.93,62.04 78.93,37.49 78.61,37.17 78.61,34.97 71.58,27.94 v66.04,27.94
  other vias: 74.74,69.22
LOC5  (via drill 1.52)
  Top 0.381: IC1.45 98.7,134.26 96.52,132.08 96.52,130.81
  Top 1.016: R21.1 74.74,64.3 87.63,77.19 87.63,121.92 96.52,130.81 | J1.6 68.58,26.71 68.71,26.84 68.71,29.04 68.58,29.17 v68.58,34.29
  Bottom 0.381: 75.09,59.53 74.77,59.21 R21.1
  Bottom 1.016: v68.58,34.29 74.93,34.29 76.58,35.94 76.58,38.02 76.89,38.33 76.89,57.73 75.09,59.53 74.93,59.69
LOC6
  Top 0.381: IC1.47 98.97,133.26 97.79,132.08 97.79,129.54
  Top 1.016: 97.79,129.54 90.17,121.92 90.17,69.73 74.74,54.3 R22.1 71.25,45.73 71.25,33.19 71.12,33.06 J1.7
LOC7
  Top 0.381: IC1.49 99.24,132.26 99.06,132.08 99.06,128.27 | 74.91,39.39 74.93,39.41
  Top 1.016: 99.06,128.27 93.98,123.19 93.98,68.58 78.74,53.34 78.74,44.32 74.91,40.49 74.91,39.39 R23.1 73.66,38.14 J1.8
MIN0  (via drill 1.52)
  Top 0.381: IC1.55 105.09,126.68 104.14,125.73 102.87,125.73
  Top 1.016: R24.1 96.52,87.44 96.52,121.92 100.33,125.73 102.87,125.73 | v96.52,22.86 96.52,21.62 96.44,21.55 96.44,19.34 96.52,19.26 J1.17
  Bottom 1.016: R24.1 97.79,78.55 97.79,47.8 97.25,47.26 97.25,32.93 96.92,32.6 96.92,23.26 v96.52,22.86
MIN1  (via drill 1.52)
  Top 0.381: IC1.57 106.09,126.41 102.87,123.19
  Top 1.016: R25.1 105.6,82.36 99.06,88.9 99.06,120.65 101.6,123.19 102.87,123.19 | J1.18 99.06,20.32 99.11,20.37 v99.11,20.44
  Bottom 1.016: R25.1 111.57,82.36 106.68,77.47 106.68,59.69 99.82,52.83 99.82,46.96 99.29,46.42 99.29,32.09 98.96,31.76 98.96,27.3 99.19,27.07 99.19,21.75 99.11,21.68 v99.11,20.44
MIN2  (via drill 1.52)
  Top 0.381: IC1.59 107.09,124.87 | 121.47,82.55 121.44,82.39 R26.1
  Top 1.016: 107.09,124.87 107.09,96.93 121.47,82.55 121.92,82.55 | J1.19 101.6,19.09 101.78,19.26 101.78,22.15 v102.49,22.86
  Bottom 1.524: R26.1 120.46,82.36 116.84,78.74 116.84,25.4 105.03,25.4 v102.49,22.86
MIN3  (via drill 1.52)
  Top 0.381: IC1.61 108.09,125.59 109.22,124.46
  Top 1.016: R27.1 109.22,104.74 109.22,124.46
  Top 1.524: J1.20 104.14,20.32 104.26,20.44 104.27,20.44 105.44,21.62 v105.79,21.62
  Bottom 1.524: R27.1 127,77.76 127,27.94 120.29,21.23 106.17,21.23 v105.79,21.62
N$1
  Top 0.381: IC1.3 100.01,155.26 99.06,156.21
  Top 1.016: S14.3 R14.1
  Top 1.524: R14.1 33.21,179.26 35.56,181.61 73.66,181.61 99.06,156.21
N$2
  Top 0.381: IC1.10 90.81,151.76 88.9,153.67
  Top 1.016: S11.3 R11.1
  Top 1.524: R11.1 33.21,128.08 33.02,128.27 62.23,157.48 85.09,157.48 88.9,153.67
N$3
  Top 0.381: IC1.142 137.16,149.26
  Top 1.016: 198.12,87.82 198.12,91.44 194.31,95.25 194.31,113.03 181.61,125.73 181.61,138.43 171.32,148.72 142.37,148.72 141.82,149.26 137.16,149.26 | 198.12,87.82 R1.1 | S1.3 199.01,86.93 198.12,87.82
N$4
  Top 1.016: S1.4 222.99,86.93 C1.1
N$5
  Top 1.016: S1.2 222.99,91.93 C1.2
N$6  (1 unrouted)
  Top 0.381: IC1.140 136.22,148.26 138.43,146.05 142.24,146.05
  Top 1.016: S2.3 205.8,21.59 R2.1 200.47,79.13 193.87,85.73 193.87,90.61 187.96,96.52 187.96,113.03 179.07,121.92 179.07,137.16 170.18,146.05 139.7,146.05
N$7
  Top 1.016: S3.4 217.77,104.18 C2.1
N$8
  Top 1.016: S2.4 C3.1
N$9
  Top 0.381: IC1.145 139.33,150.76 139.7,151.13 140.97,151.13
  Top 1.016: 198.14,103.93 S3.3 | 198.14,103.93 R3.1 | 198.14,103.93 198.14,116.82 184.15,130.81 184.15,139.7 172.72,151.13 140.97,151.13
N$10
  Top 1.016: S2.2 C3.2
N$11
  Top 1.016: S3.2 217.77,109.18 C2.2
N$12
  Top 0.381: IC1.147 137.79,151.76 139.7,153.67
  Top 1.016: S4.3 204.74,120.65 198.12,120.65 | 198.12,120.65 198.12,123.19 187.27,134.04 187.27,140.39 173.99,153.67 139.7,153.67 | 198.12,120.65 R4.1 197.56,120.65 197.2,121
N$13
  Top 1.016: S4.4 223.28,120.93 C4.1
N$14
  Top 1.016: S4.2 223.28,125.93 C4.2
N$15
  Top 0.381: IC1.8 93.62,152.76 91.44,154.94
  Top 1.016: S12.3 R12.1 33.02,141.1
  Top 1.524: R12.1 33.21,144.97 49.53,161.29 85.09,161.29 91.44,154.94
N$16
  Top 1.016: S5.4 222.79,137.93 C5.1
N$17
  Top 1.016: S5.2 222.79,142.93 C5.2
N$18
  Top 0.381: IC1.151 134.71,153.76 135.89,154.94
  Top 1.016: S6.3 R6.1 196.66,157.48 195.39,158.75 139.7,158.75 135.89,154.94
N$19
  Top 0.381: IC1.149 136.25,152.76 137.16,153.67
  Top 1.016: S5.3 198.43,137.93 R5.1 198.12,138.43 198.12,140.97 182.88,156.21 139.7,156.21 137.16,153.67
N$20
  Top 1.016: S6.4 223.47,154.93 C6.1
N$21
  Top 0.381: IC1.19 97.73,147.26 91.44,143.51
  Top 1.016: S8.3 R8.1 33.21,52.26 45.47,64.52 45.47,111.51 77.47,143.51 91.44,143.51
N$22
  Top 1.016: S8.4 C8.1
N$23
  Top 1.016: S8.2 C8.2
N$24
  Top 1.016: S15.4 8.89,21.59 C15.1
N$25
  Top 0.381: IC1.17 97.79,148.26 92.71,146.05
  Top 1.016: S9.3 R9.1
  Top 1.524: R9.1 33.21,77.66 36.83,81.28 36.83,95.25 43.18,101.6 43.18,116.84 72.39,146.05 92.71,146.05
N$26
  Top 1.016: C9.1 S9.4
N$27
  Top 1.016: S9.2 C9.2
N$28
  Top 1.016: C10.1 S10.4
N$29
  Top 1.016: C10.2 S10.2
N$30
  Top 1.016: C11.1 S11.4
N$31
  Top 1.016: C11.2 S11.2
N$32
  Top 1.016: C12.1 S12.4
N$33
  Top 1.016: C12.2 S12.2
N$34
  Top 0.381: IC1.6 101.45,153.67 97.79,153.67 96.52,154.94
  Top 1.016: R13.1 27.56,159.31 S13.3
  Top 1.524: R13.1 33.21,162.75 38.1,167.64 83.82,167.64 96.52,154.94
N$35
  Top 1.016: S13.4 14.96,158.79 C13.1
N$36
  Top 1.016: S13.2 14.96,163.79 C13.2
N$37
  Top 1.016: S15.2 C15.2
N$38
  Top 1.016: C14.1 S14.4
N$39
  Top 1.016: C16.1 S17.4
N$40
  Top 1.016: C14.2 S14.2
N$41  (1 unrouted)
  Top 0.381: IC1.12 88,150.76 85.09,153.67
  Top 1.016: 32.54,105.33 S10.3
  Top 1.524: R10.1 33.21,111.95 36.83,115.57 36.83,127 63.5,153.67 85.09,153.67
N$42
  Top 1.016: C16.2 S17.2
N$45
  Top 1.016: R16.2 D1.1
N$46
  Top 1.016: R17.2 D2.1
N$47
  Top 1.016: R18.2 D3.1
N$48
  Top 1.016: D4.1 R19.2
N$49
  Top 1.016: D5.1 R20.2
N$50
  Top 1.016: D6.1 R21.2
N$51
  Top 1.016: D7.1 R22.2
N$52
  Top 1.016: R23.2 D8.1
N$53
  Top 1.016: R43.2 D27.1
N$54
  Top 1.016: S6.2 223.47,159.93 C6.2
N$55
  Top 0.381: IC1.154 133.67,155.26 134.62,156.21
  Top 1.016: S7.3 204.54,171.45 R7.1 197.93,167.64 191.58,161.29 139.7,161.29 134.62,156.21
N$56
  Top 1.016: S7.4 223.08,171.93 C7.1
N$57
  Top 1.016: S7.2 223.08,176.93 C7.2
N$61
  Top 1.016: D9.1 R24.2
N$62
  Top 1.016: R25.2 D10.1
N$63
  Top 1.016: D11.1 R26.2
N$64
  Top 1.016: R27.2 D12.1
N$65
  Top 1.016: D13.1 91.44,30.97 R28.2
N$66
  Top 1.016: R29.2 101.44,32.83 D14.1
N$67
  Top 1.016: R30.2 D15.1
N$68
  Top 1.016: R31.2 D16.1
N$78
  Top 1.016: D17.1 R32.2
N$79
  Top 1.016: D18.1 R33.2
N$80
  Top 1.016: D19.1 R34.2
N$81
  Top 1.016: D20.1 R35.2
N$84
  Top 1.016: R36.2 D21.1
N$85
  Top 1.016: R37.2 D22.1
N$90
  Top 1.016: D23.1 R38.2
N$91
  Top 1.016: R39.2 D24.1
N$92
  Top 1.016: D25.1 R40.2
N$93
  Top 1.016: R41.2 D26.1
N$98
  Top 0.381: IC1.195 110.59,161.39 110.49,162.56
  Top 1.524: S16.P$3 126.34,176.75 125.18,176.75 122.87,174.44 110.49,162.56
N$99
  Top 1.524: S16.P$2 126.54,180.34 139.7,180.34 R42.1
PIN15
  Top 0.381: 84.49,149.26 IC1.15
  Top 1.016: S17.3 R44.1
  Top 1.524: 84.49,149.26 69.25,149.26 45.4,125.41 45.4,125.32 40.41,120.33 40.41,114.22 36.77,110.59 36.77,98.78 33.21,95.22 R44.1
RST
  Top 0.381: IC1.21 98,146.26 | 97.79,146.05 98,146.26 | 92.86,142.24 98,146.26
  Top 1.016: S15.3 R15.1 47.5,33.34 47.5,108.46 80.01,140.97 91.44,140.97 92.86,142.24
SEG0
  Top 0.381: IC1.91 123.09,126.9 121.92,125.73
  Top 1.016: 121.92,125.73 120.65,124.46 119.38,124.46 119.38,105.41 137.16,87.63 137.16,58.42 104.33,58.42 R28.1 94.17,45.53 95.25,44.45 95.25,26.67 96.39,25.53 103.59,25.53 104.84,24.28 106.9,24.28 108.32,22.86 115.57,22.86 117.45,20.98 117.82,20.98 119.2,19.6 119.2,19.23 J2.1
SEG1
  Top 0.381: IC1.93 124.09,125.36 123.19,124.46
  Top 1.016: 123.19,124.46 121.92,123.19 121.92,107.95 139.7,90.17 139.7,57.86 137.72,55.88 111.79,55.88 R29.1 101.79,45.53 105.41,41.91 105.41,28.64 109.16,24.89 117.72,24.89 123.01,19.6 123.01,17.96 J2.2
SEG2
  Top 0.381: IC1.95 125.09,125.1 124.46,124.47 124.46,123.19
  Top 1.016: 124.46,123.19 124.46,109.22 142.24,91.44 142.24,57.15 138.43,53.34 119.25,53.34 R30.1 113.22,45.53 116.84,41.91 116.84,28.64 125.55,19.93 125.55,17.96 J2.3
SEG3
  Top 0.381: IC1.97 126.09,125.37 127,124.46
  Top 1.016: 127,124.46 127,110.49 144.78,92.71 144.78,55.88 139.7,50.8 124.46,50.8 121.44,47.78 R31.1 122.11,45.53 125.73,41.91 125.73,26.67 128.27,24.13 J2.4
SEG4
  Top 0.381: IC1.99 127.09,126.91 129.54,124.46
  Top 1.016: 129.54,124.46 129.54,111.76 147.32,93.98 147.32,54.61 140.97,48.26 134.17,48.26 R32.1 133.54,45.53 135.89,43.18 135.89,27.94 130.81,22.86 J2.5
SEG5
  Top 0.381: IC1.101 128.09,127.18 129.54,125.73 130.81,125.73
  Top 1.016: R33.1 149.86,53.95 149.86,95.25 132.08,113.03 132.08,124.46 130.81,125.73 | J2.6 133.35,19.42 133.43,19.49 133.43,21.18 133.84,21.18 136.79,24.13 143.51,24.13 147.32,27.94 147.32,43.18 144.97,45.53 141.16,45.53
  Top 1.524: 141.16,45.53 R33.1
SIRENA
  Top 0.381: IC1.160 128.09,161.11 128.27,161.29
  Top 1.016: 128.27,161.29 130.81,163.83 147.32,163.83 152.4,168.91 152.4,177.8 157.48,182.88 R43.1
TCK  (via drill 1.52)
  Top 0.381: IC1.30 99.54,141.76 99.06,142.24
  Top 1.016: 99.06,142.24 v97.79,142.24
  Bottom 1.524: J2.24 179.07,11.43 185.42,5.08 198.44,5.08 201.93,8.57 201.93,19.64 202.88,20.59 202.88,22.59 201.93,23.54 201.93,104.14 163.83,142.24 v97.79,142.24
TDI
  Top 0.381: IC1.176 120.09,160.73 120.65,161.29
  Top 1.016: J2.23 176.53,19.42 178.09,20.98 184.32,20.98 186.34,18.96 206.95,18.96 214.85,26.87 214.85,179.16 208.82,185.19 149.48,185.19 134.63,170.34 129.98,170.34 129.98,170.25 129.61,170.25 120.65,161.29
TDO  (via drill 1.52)
  Top 0.381: IC1.189 113.59,160.58 114.3,161.29
  Top 1.016: v119.38,166.37 116.1,163.09 116.09,163.09 114.3,161.3 114.3,161.29
  Top 1.524: v210.82,8.89 v198.12,8.89
  Bottom 0.381: J2.25 181.61,17.14 181.69,16.51
  Bottom 1.524: v119.38,166.37 172.72,166.37 191.77,147.32 210.82,147.32 v210.82,8.89 | v198.12,8.89 187.96,8.89 181.61,15.24 181.61,15.78 181.69,15.86 181.69,16.51
TMS
  Top 0.381: IC1.127 134.14,141.76 134.62,142.24
  Top 1.016: 134.62,142.24 137.16,144.78 138.43,143.51 156.54,143.51 173.45,126.6 173.45,119.34 182.66,110.14 182.66,30.25 173.99,21.59 J2.22
VCC  (via drill 1.52)  (6 unrouted)
  Top 0.381: IC1.165 125.59,161.29 125.73,161.29 | IC1.191 112.59,156.21 | 112.59,156.21 112.59,154.11 | 112.59,154.11 113.03,153.67 123.19,153.67 | IC1.165 125.73,158.67 | IC1.165 125.59,156.07 123.19,153.67 | IC1.5 103.46,154.26 104.14,154.94 | 104.14,154.94 111.76,154.94 112.59,154.11 | IC1.143 132.04,149.86 127,149.86 123.19,153.67 | IC1.186 115.09,156.21 | 115.09,156.21 112.59,156.21 | IC1.179 118.59,156.21 115.09,156.21 | S3.1 205.11,109.06 205.74,109.22 | IC1.41 104.78,136.26 | 104.78,136.26 105.04,136.26 | IC1.63 109.09,131.95 104.78,136.26 | 101.6,160.02 102.98,158.64 102.98,157.81 104.14,156.65 104.14,154.94
  Top 1.524: 19.05,163.24 19.05,181.61 27.33,181.61 S14.1 27.52,184.15 77.47,184.15 101.6,160.02 | 19.05,163.24 19.05,146.05 | 19.05,146.05 19.05,128.27 | 19.05,128.27 19.05,110.49 | 19.05,110.49 19.05,92.71 | 19.05,92.71 19.05,73.66 | 19.05,73.66 19.05,54.61 | 19.05,54.61 19.73,53.93 S8.1 | S9.1 27.42,73.66 19.05,73.66 | S17.1 19.35,92.41 19.05,92.71 | S10.1 19.44,110.1 19.05,110.49 | S11.1 19.44,128.66 19.05,128.27 | S12.1 19.15,145.95 19.05,146.05 | S13.1 19.05,163.24 | S15.1 27.8,26.67 20.32,26.67 | 20.32,26.67 19.05,27.94 | 19.05,27.94 19.05,54.61 | J2.11 J2.10 142.24,17.78 | J2.9 139.7,17.78 | J2.9 J2.8 | J2.9 142.24,17.78 | 142.24,17.78 142.24,13.97 99.06,13.97 v99.06,13.74 | 19.05,27.94 19.05,15.24 v20.32,13.97 | 20.32,26.67 19.05,26.67 | 125.59,161.29 125.59,162.42 130.81,167.64 137.16,167.64 139.7,170.18 R42.2 | v181.61,171.45 187.09,176.93 S7.1 207.88,176.93 209.55,175.26 209.55,160.02 | 209.55,160.02 209.46,159.93 S6.1 | 209.55,160.02 209.55,147.46 | 209.55,147.46 S5.1 | 209.55,147.46 209.55,130.46 | 209.55,130.46 S4.1 | 209.55,130.46 209.55,113.03 | 209.55,113.03 205.74,109.22 | 209.55,113.03 209.55,96.46 | 209.55,96.46 S1.1 | 209.55,96.46 209.55,30.34 S2.1
  Bottom 1.524: v99.06,13.74 20.32,13.74 v20.32,13.97 | R42.2 181.42,171.64 v181.61,171.45
  other vias: 139.7,171.64 139.7,171.64
VIS0  (via drill 1.52)
  Top 0.381: IC1.123 134.68,139.76 135.89,140.97
  Top 1.016: R37.1 167.83,129.35 156.21,140.97 135.89,140.97 | J1.9 76.2,37.63 82.04,43.48 v82.04,51.31
  Bottom 1.016: R37.1 109.22,108.74 | 106.68,108.74 104.93,108.74 96.04,108.74
  Bottom 1.524: 96.04,108.74 82.22,94.92 82.22,51.49 v82.04,51.31 | 104.93,108.74 109.22,108.74 168.43,108.74 168.91,109.22
VIS1  (via drill 1.52)
  Top 0.381: IC1.121 134.95,138.76 135.26,139.06 137.16,139.06
  Top 1.016: R36.1 167.83,103.82 160.02,111.63 160.02,125.73 146.69,139.06 137.16,139.06 | J1.10 78.74,30.14 78.23,30.64 78.23,35.05 85.98,42.8 v85.98,55.88
  Bottom 1.524: R36.1 167.51,99.06 92.71,99.06 86.23,92.58 86.23,56.13 v85.98,55.88
VIS2  (via drill 1.52)
  Top 0.381: IC1.119 141.64,137.76 142.24,137.16
  Top 1.016: 142.24,137.16 147.32,132.08 147.32,119.81 165.04,102.09 165.04,90.17 166.47,88.74 R35.1 | J1.11 81.28,25.06 80.77,25.56 80.77,27.77 80.9,27.9 v80.9,31.75
  Bottom 1.016: 163.21,92.09 R35.1
  Bottom 1.524: v80.9,31.75 80.9,36.23 81.21,36.54 81.21,46.34 90.17,55.3 90.17,90.17 92.71,92.71 162.59,92.71 163.21,92.09
VIS3  (via drill 1.52)
  Top 0.381: IC1.117 140.1,136.76 142.24,134.62
  Top 1.016: 142.24,134.62 144.78,132.08 144.78,119.38 162.56,101.6 162.56,82.55 v166.37,78.74 R34.1 | J1.12 83.82,21.63 83.69,21.75 83.69,26.42 v83.44,26.67
  Bottom 1.524: v166.37,78.74 156.21,88.9 96.52,88.9 92.71,85.09 92.71,52.07 83.82,43.18 83.82,27.05 v83.44,26.67
VIS4  (via drill 1.52)
  Top 0.381: IC1.114 139.06,135.26 139.7,134.62
  Top 1.016: R41.1 160.02,75.91 160.02,100.33 142.24,118.11 142.24,132.08 139.7,134.62
  Top 1.524: v86.36,22.86 J1.13
  Bottom 1.016: 86.36,33.02 86.36,40.64 87.63,41.91 93.98,41.91 95.22,43.15 95.22,82.52 95.25,82.55
  Bottom 1.524: v86.36,22.86 86.36,33.02 | 95.25,82.55 97.79,85.09 150.84,85.09 R41.1
  other vias: 166.56,69.37
VIS5  (via drill 1.52)
  Top 0.381: IC1.112 137.52,134.26 138.43,133.35
  Top 1.016: 138.43,133.35 139.57,132.21 139.57,116.97 157.48,99.06 157.48,67.31 165.29,59.5 166.43,59.5 R40.1 | J1.14 88.98,17.78 88.98,14.38 89.41,14.38 89.41,10.67 93.22,6.86 189.99,6.86 194.34,11.2 195.81,11.2 195.81,12.7 v196.85,12.7
  Bottom 1.016: v196.85,12.7 196.85,44.45 187.96,53.34 168.91,53.34 166.56,55.69 R40.1
VIS6  (via drill 1.52)
  Top 0.381: IC1.110 135.98,133.26 137.16,132.08
  Top 1.016: 137.16,132.08 137.16,115.57 154.94,97.79 154.94,64.59 R39.1 166.56,46.8 168.28,45.09 168.28,41.27 176.53,33.02 v177.8,33.02 | J1.15 91.44,12.7 95.25,8.89 187.96,8.89 v193.04,13.97
  Bottom 1.016: v193.04,13.97 193.04,17.78 v177.8,33.02
VIS7  (via drill 1.52)
  Top 0.381: IC1.108 134.44,132.26 134.62,132.08
  Top 1.016: 134.62,132.08 134.62,114.3 152.4,96.52 152.4,59.13 R38.1 | J1.16 93.98,13.97 96.52,11.43 185.42,11.43 v187.96,13.97
  Bottom 1.016: v187.96,13.97 187.33,14.61 187.96,15.24 187.96,17.97 R38.1